# Altium PCB MotorDriver.PcbDoc
Units mm, origin at the board's own origin, x right, y up, seen from the top; angles counter-clockwise.
Board outline 97.16 x 62.48 mm, 2 copper layers (Top Layer, Bottom Layer); 84 components, 44 nets, 271 pads, 6 vias.
Unrouted connection lines stored in the file: 135.
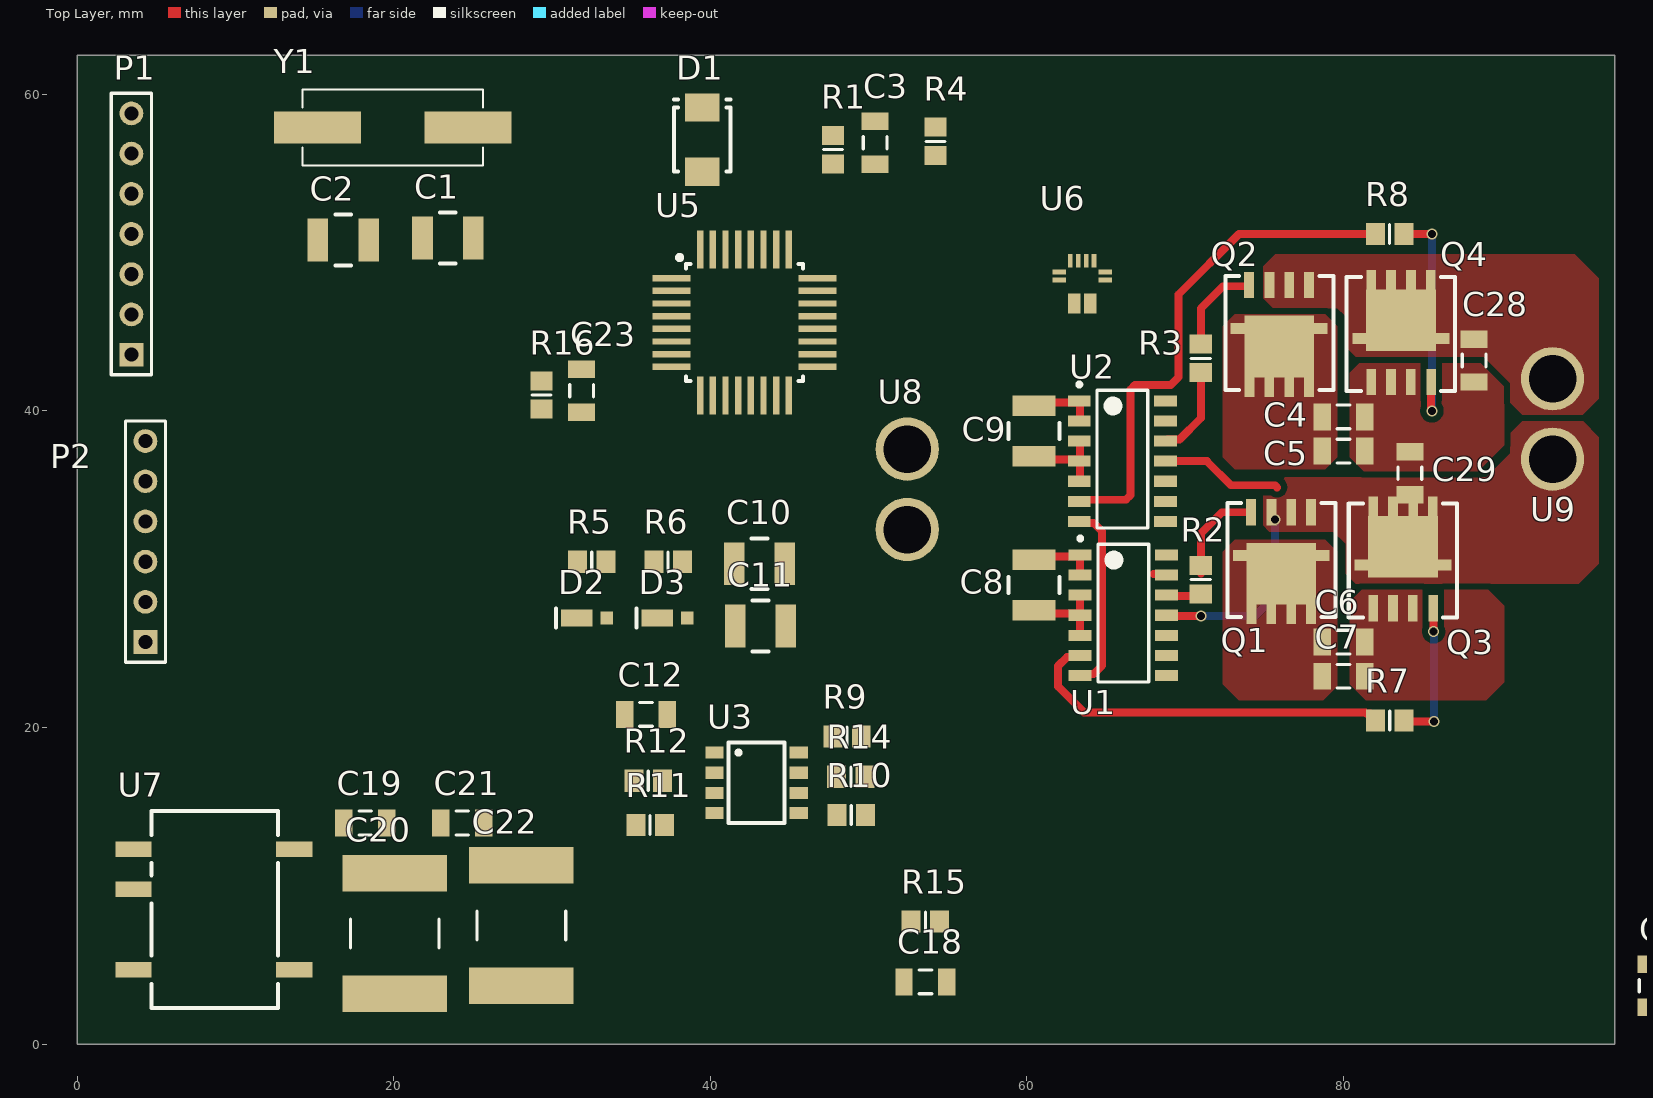
[diagram p0: Top Layer view]
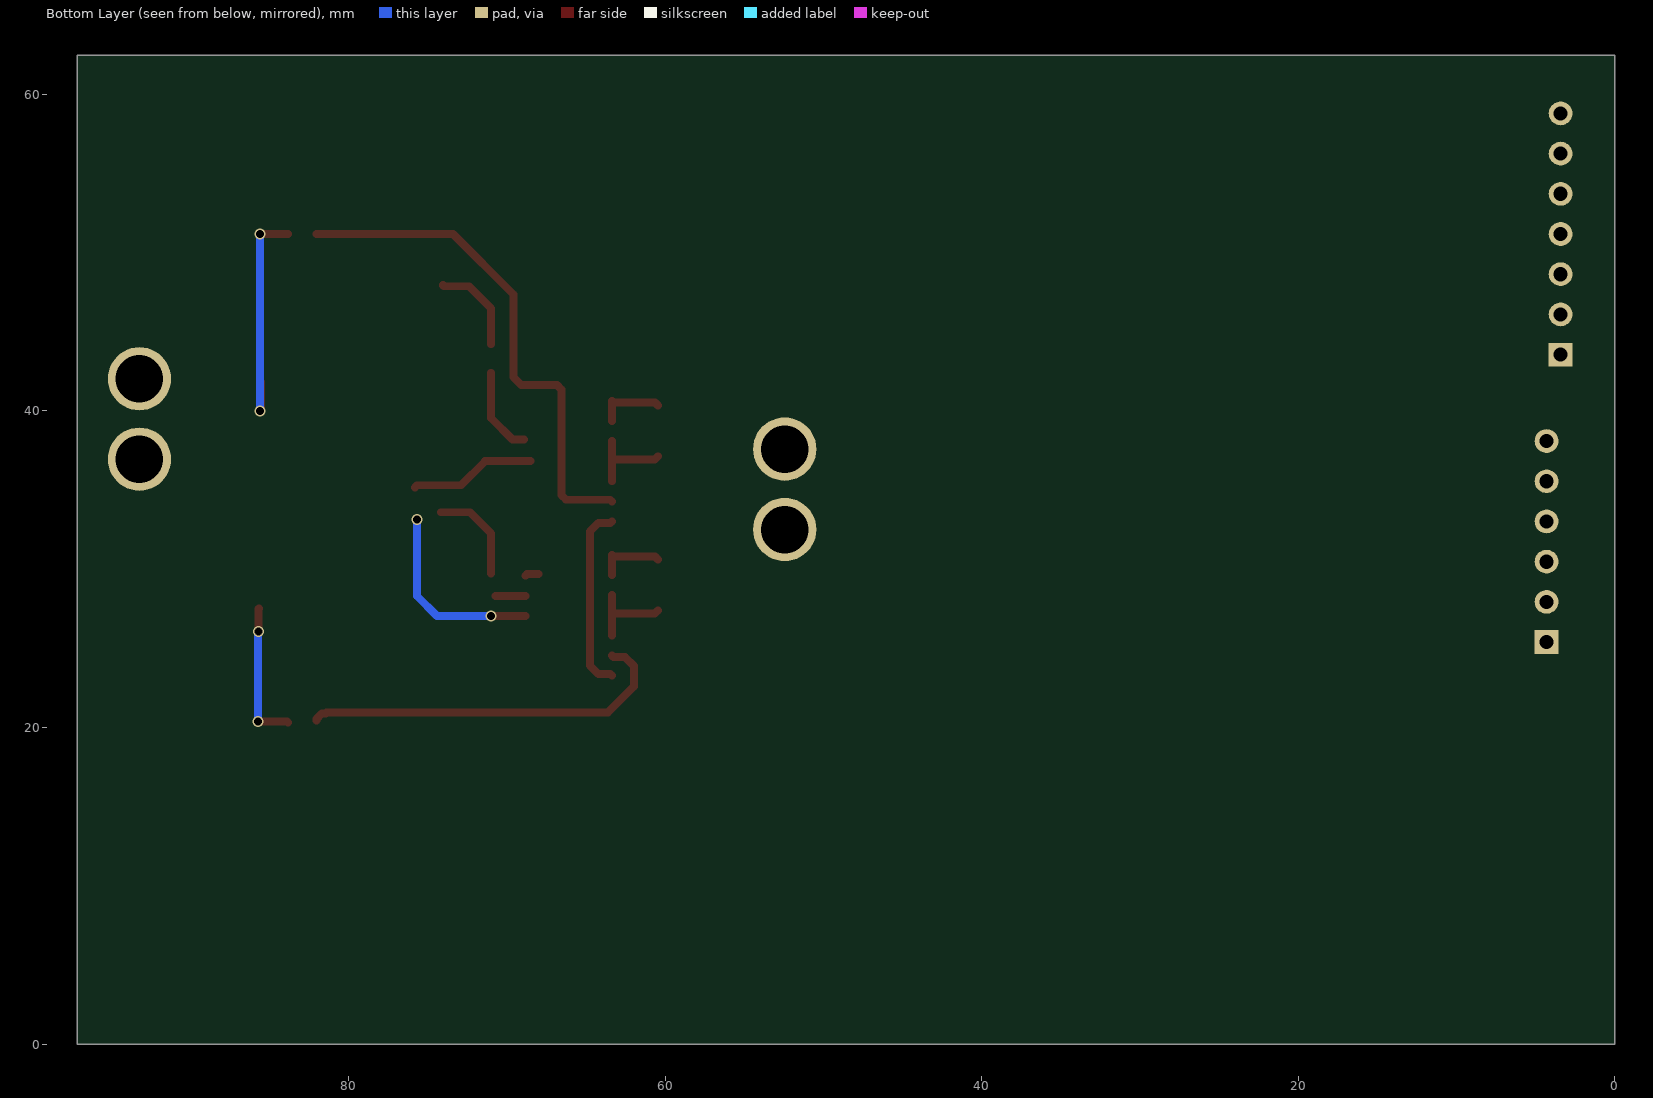
[diagram p1: Bottom Layer view, seen from below]

## Layer stack, top to bottom
Top Solder: solder mask 0.0102, Solder Resist, Dk 3.5
Top Layer: signal copper 0.0356
Dielectric 1: dielectric 0.32, FR-4, Dk 4.8
Bottom Layer: signal copper 0.0356
Bottom Solder: solder mask 0.0102, Solder Resist, Dk 3.5

## Board outline
0,0 97.155,0 97.155,62.484 0,62.484

## Design rules (kind name [scope] priority, off if disabled: settings)
Clearance [not InComponent('U6')] p1: gap=0.4 ignorepadtopadclearanceinfootprint=FALSE
PolygonConnect PowerDevices [All] p1: connectstyle=Direct reliefconductorwidth=0.254 reliefentries=4 polygonreliefangle="90 Angle" airgapwidth=0.254
PolygonConnect [All] p2: connectstyle=Relief reliefconductorwidth=0.254 reliefentries=4 polygonreliefangle="90 Angle" airgapwidth=0.254
RoutingVias [All] p1: holewidth=0.5 width=0.6 viastyle="Through Hole" minholewidth=0.5 minwidth=0.599 maxholewidth=0.711 maxwidth=1.27
SolderMaskExpansion [All] p1: expansion=0.102 istentingtop=FALSE
Width [All] p1: maxlimit=5 minlimit=0.499 preferedwidth=0.5
30 further rules are at their usual default settings.

## Components (designator, comment, footprint, x,y, rotation, side; value= is the part's Value field where it differs from the comment)
C1 "Cap CER" C1210 23.419,50.927 r0 top value=2200nF/100V
C2 "Cap CER" C1210 16.815,50.8 r180 top value=2200nF/100V
C3 "Cap CER" C1206 50.419,56.943 r270 top value=100nF/100V
C4 "Cap CER" C1206 80.01,39.624 r180 top value=100nF/100V
C5 "Cap CER" C1206 80.01,37.465 r180 top value=100nF/100V
C6 "Cap CER" C1206 80.01,25.4 r180 top value=100nF/100V
C7 "Cap CER" C1206 80.01,23.241 r180 top value=100nF/100V
C8 "Cap CER" C1210 60.452,29.007 r90 top value=2200nF/100V
C9 "Cap CER" C1210 60.452,38.74 r90 top value=2200nF/100V
C10 "Cap CER" C1210 43.104,30.353 r0 top value=2200nF/100V
C11 "Cap CER" C1210 43.18,26.416 r0 top value=2200nF/100V
C12 "Cap CER" C1206 35.941,20.828 r0 top value=100nF/100V
C13 "Cap CER" C1206 62.738,81.153 r0 top value=100nF/100V
C14 "Cap CER" C1206 63.754,85.725 r0 top value=100nF/100V
C15 "Cap Film" LDECE4150KA0N00 70.485,72.771 r90 top value=1.5uF/50V
C16 "Cap CER" C1206 63.627,89.408 r0 top value=100nF/100V
C17 "Cap Film" LDECE4150KA0N00 70.739,85.598 r90 top value=1.5uF/50V
C18 "Cap CER" C1206 53.594,3.937 r0 top value=100nF/100V
C19 "Cap CER" C1206 18.208,13.97 r0 top value=100nF/100V
C20 "Cap Film" LDECE4150KA0N00 20.066,6.985 r90 top value=1.5uF/50V
C21 "Cap CER" C1206 24.337,13.97 r0 top value=100nF/100V
C22 "Cap Film" LDECE4150KA0N00 28.067,7.493 r90 top value=1.5uF/50V
C23 "Cap CER" C1206 31.877,41.275 r270 top value=100nF/100V
C24 "CER 100nF" C1206 114.291,49.238 r0 top value=100nF/100V
C25 "CER 100nF" C1206 124.968,50.292 r90 top value=100nF/100V
C26 "CER 100nF" C1206 130.81,50.292 r90 top value=100nF/100V
C27 "CER 100nF" C1206 136.652,50.292 r90 top value=100nF/100V
C28 "CER 100nF" C1206 88.265,43.18 r90 top value=100nF/100V
C29 "CER 100nF" C1206 84.201,36.068 r270 top value=100nF/100V
C30 "CER 100nF" C1206 154.178,50.292 r90 top value=100nF/100V
C31 "CER 100nF" C1206 161.036,51.435 r0 top value=100nF/100V
C32 "CER 100nF" C1206 165.354,50.292 r90 top value=100nF/100V
C33 "CER 100nF" C1206 171.196,50.292 r90 top value=100nF/100V
C34 "Cap CER" C1206 142.494,4.318 r90 top value=100nF/100V
C35 "Cap CER" C1206 99.441,3.683 r90 top value=100nF/100V
D1 "DO-214AA SMB" DO-214AA 39.497,57.15 r270 top
D2 "MSS1P6-M3/89A" "MicroSMP (DO-219AD)" 32.512,26.924 r0 top
D3 "MSS1P6-M3/89A" "MicroSMP (DO-219AD)" 37.592,26.924 r0 top
P1 "Header 7" HDR1X7 3.429,43.561 r90 top
P2 "Header 6" HDR1X6 4.318,25.4 r90 top
Q1 "NMOS" BSC072N08NS5ATMA1_modified_v2 76.073,30.48 r180 top
Q2 "NMOS" BSC072N08NS5ATMA1_modified_v2 75.946,44.838 r180 top
Q3 "NMOS" BSC072N08NS5ATMA1_modified_v2 83.769,30.658 r0 top
Q4 "NMOS" BSC072N08NS5ATMA1_modified_v2 83.642,44.958 r0 top
R1 "Resistor 0805" R0805 47.752,56.515 r90 top value=?
R2 "Resistor 0805" R0805 70.993,29.348 r90 top value=?
R3 "Resistor 0805" R0805 70.993,43.318 r90 top value=?
R4 "Resistor 0805" R0805 54.229,57.034 r270 top value=?
R5 "Resistor 0805" R0805 32.512,30.48 r0 top value=?
R6 "Resistor 0805" R0805 37.338,30.48 r0 top value=?
R7 "Resistor 0805" R0805 82.931,20.447 r0 top value=?
R8 "Resistor 0805" R0805 82.92,51.181 r0 top value=?
R9 "Resistor 0805" R0805 48.641,19.431 r0 top value=?
R10 "Resistor 0805" R0805 48.906,14.478 r0 top value=?
R11 "Resistor 0805" R0805 36.195,13.843 r0 top value=?
R12 "Resistor 0805" R0805 36.079,16.637 r0 top value=?
R13 "Resistor 0805" R0805 62.368,74.676 r0 top value=?
R14 "Resistor 0805" R0805 48.884,16.891 r0 top value=?
R15 "Resistor 0805" R0805 53.594,7.747 r0 top value=?
R16 "Resistor 0805" R0805 29.337,41.01 r90 top value=?
TP_3V3 "TP_3V3" TP5015 208.407,4.699 r90 top
TP_12V "TP_12V" TP5015 179.959,4.699 r90 top
TP_DIR "TP_DIR" TP5015 248.158,4.699 r90 top
TP_GND "TP_GND" TP5015 128.905,29.972 r90 top
TP_PWML "TP_F/B" TP5015 215.265,4.699 r90 top
TP_PWMR "TP_PWM" TP5015 187.325,4.699 r90 top
TP_RX "TP_RX" TP5015 226.822,4.699 r90 top
TP_TX "TP_TX" TP5015 106.68,37.084 r90 top
TP_Vi "TP_Vi" TP5015 198.755,4.699 r90 top
TP_Vi_amp "TP_Vi_amp" TP5015 147.955,4.445 r90 top
TP_Vpwmn "TP_Vsi" TP5015 117.602,19.304 r90 top
TP_Vpwmp "TP_Vi_amp" TP5015 115.697,4.318 r90 top
TP_Vsi "TP_Vsi" TP5015 130.81,4.699 r90 top
TP_Vso "TP_Vso" TP5015 105.156,4.699 r90 top
U1 "IRS21834SPBF" SOIC127P600X175-14N 66.098,27.097 r0 top
U2 "IRS21834SPBF" SOIC127P600X175-14N 66.04,36.83 r0 top
U3 "LT6221IS8#PBF" SOIC8_NARROW 42.926,16.51 r0 top
U4 "LD1086D2M" D2PAK-3L 81.153,75.438 r180 top
U5 "ATMega328PB" TQFP32 42.164,45.593 r0 top
U6 "ACS70331EESATR-005U3" ACS70331_12QFN 63.5,48.133 r90 top
U7 "ISE0312A" ISE0312A 8.382,8.509 r0 top
U8 "2 PIN HEADER 3MM" 3mm_holes 52.451,35.052 r90 top
U9 "2 PIN HEADER 3MM" 3mm_holes 93.218,39.497 r270 top
Y1 "ECS-80-18-5PX-TR" XTAL_ECS-80-18-5PX-TR 19.939,57.912 r180 top

## Footprints (in the part's own frame and the unit in brackets; to place one, negate y for a bottom-side part, rotate by r counter-clockwise, add the part's x,y. Pads: shape width x height; smd on the part's side, far side on the other; paste and mask are expansions set on the pad)
3mm_holes [mm]
  round 4 hole 3: 1(-2.54,0) 2(2.54,0)
ACS70331_12QFN [mm] "HIGH SENSITIVITY, 1 MHZ, GMR-BAS"
  rect 1.27x0.8 smd: 1(-1.35,0.5) 2(-1.35,-0.5)
  rect 0.3x0.85 smd: 5(0.15,-1.45) 6(0.65,-1.45) 11(0.65,1.45) 12(0.15,1.45)
  rect 0.85x0.3 smd: 7(1.35,-0.75) 8(1.35,-0.25) 9(1.35,0.25) 10(1.35,0.75)
  body extent -1.6,-1.5 1.4,1.5, height 0.75
BSC072N08NS5ATMA1_modified_v2 [mil]
  rect 23.94x65 smd: 1(-74,-123) 1(-25,-123) 1(24,-123) 4(75,-123) 8(-74,123) 8(-25,123) 8(25,123) 8(74,123)
  rect 65x27.87 smd: 8(-88,-15) 8(88,-15)
  rect 173.62x153.54 smd: 8(0,30.26)
  silkscreen extent -135,-146 134,138, body extent -106,-127 107,127, height 40
C1206 [mm] "Chip Capacitor, Body 3.2x1.6mm, IPC High Density"
  rect 1.1x1.7 smd: 1(-1.35,0) 2(1.35,0)
  silkscreen extent -0.4,-0.75 0.4,0.75, body extent -1.6,-0.8 1.6,0.8, height 1.5
C1210 [mm]
  rect 1.3x2.7 smd: 1(-1.6,0) 2(1.6,0)
  silkscreen extent -0.5,-1.6 0.5,1.6, body extent -1.8,-1.4 1.8,1.4, height 1.24
D2PAK-3L [mil]
  rect 63x137.8 smd: 1(100,-350) 2(0,-350) 3(-100,-350)
  silkscreen extent -205,-165 205,295, body extent -190,-400 190,279, height 200
DO-214AA [mil]
  rect 70x85 smd: 1(-80,0) 2(80,0)
  silkscreen extent -100,-70 80,70, body extent -104,-71 104,71, height 87
HDR1X6 [mm] "Connector; Header; 6 Position"
  rect 1.5x1.5 hole 0.9: 1(0,0)
  round 1.5 hole 0.9: 2(2.54,0) 3(5.08,0) 4(7.62,0) 5(10.16,0) 6(12.7,0)
  silkscreen extent -1.27,-1.27 13.97,1.27
HDR1X7 [mm] "Connector; Header; 7 Position"
  rect 1.5x1.5 hole 0.9: 1(0,0)
  round 1.5 hole 0.9: 2(2.54,0) 3(5.08,0) 4(7.62,0) 5(10.16,0) 6(12.7,0) 7(15.24,0)
  silkscreen extent -1.27,-1.27 16.51,1.27
ISE0312A [mil] "8-SMD model; 5 leads"
  rect 90x39 smd: 1(-190,150) 2(-190,50) 4(-190,-150) 5(210,-150) 8(210,150)
  silkscreen extent -145,-245 170,245, body extent -210,-250 230,250, height 285
LDECE4150KA0N00 [mm]
  rect 2.3x6.6 smd: 1(-3.8,0) 2(3.8,0)
  silkscreen extent -0.9,-2.8 0.9,2.8, body extent -3.82,-3.26 3.88,3.24, height 4.29
"MicroSMP (DO-219AD)" [mm]
  rect 0.8x0.8 smd: 1(0.95,0)
  rect 2x1.1 smd: 2(-0.95,0)
  silkscreen extent -2.25,-0.6 -2.25,0.6, body extent -1.58,-0.64 0.92,0.66, height 0.66
R0805 [mm]
  rect 1.2x1.4 smd: 1(-0.9,0) 2(0.9,0)
  silkscreen extent 0,-0.6 0,0.6, body extent -1.04,-0.63 0.99,0.64, height 0.6
SOIC8_NARROW [mil]
  rect 45x30 smd: 1(-105,75) 2(-105,25) 3(-105,-25) 4(-105,-75) 5(105,-75) 6(105,-25) 7(105,25) 8(105,75)
  silkscreen extent -70,-100 70,100, body extent -122,-98 122,99, height 69
SOIC127P600X175-14N [mm] "SOIC, 14-Leads, Body 8.65x3.90mm, Pitch 1.27mm, IPC Medium Density"
  rect 1.45x0.7 smd: 1(-2.725,3.81) 2(-2.725,2.54) 3(-2.725,1.27) 4(-2.725,0) 5(-2.725,-1.27) 6(-2.725,-2.54) 7(-2.725,-3.81) 8(2.725,-3.81) 9(2.725,-2.54) 10(2.725,-1.27) 11(2.725,0) 12(2.725,1.27) 13(2.725,2.54) 14(2.725,3.81)
  silkscreen extent -2.85,-4.22 1.6,4.97, body extent -3,-4.19 3,4.46, height 1.56
TP5015 [mil]
  rect 105x40 smd: 1(0,0)
  body extent -51,-20 51,19, height 59
TQFP32 [mm]
  rect 2.4x0.4 smd: 1(-4.6,2.8) 2(-4.6,2) 3(-4.6,1.2) 4(-4.6,0.4) 5(-4.6,-0.4) 6(-4.6,-1.2) 7(-4.6,-2) 8(-4.6,-2.8) 17(4.6,-2.8) 18(4.6,-2) 19(4.6,-1.2) 20(4.6,-0.4) 21(4.6,0.4) 22(4.6,1.2) 23(4.6,2) 24(4.6,2.8)
  rect 0.4x2.4 smd: 9(-2.8,-4.6) 10(-2,-4.6) 11(-1.2,-4.6) 12(-0.4,-4.6) 13(0.4,-4.6) 14(1.2,-4.6) 15(2,-4.6) 16(2.8,-4.6) 25(2.8,4.6) 26(2,4.6) 27(1.2,4.6) 28(0.4,4.6) 29(-0.4,4.6) 30(-1.2,4.6) 31(-2,4.6) 32(-2.8,4.6)
  silkscreen extent -4.24,-3.7 3.7,4.24, body extent -3.5,-3.5 3.5,3.5, height 1.3
XTAL_ECS-80-18-5PX-TR [mm]
  rect 5.5x2 smd: 1(-4.75,0) 2(4.75,0)
  silkscreen extent -5.7,-2.4 5.7,2.4, body extent -6.6,-2.41 6.6,2.41, height 4.32

## Part data
C1 C2 C8 C9 C10 C11: library part "Cap CER HF DC-Link CL32B225KCJSNNE", "CAP CER 2.2UF 100V X7R 1210", Manufacturer="AVX Corporation", MPN=CL32B225KCJSNNE, Supplier Part Number 1=1276-3362-1-ND, Part Description="CAP CER 2.2UF 100V X7R 1210", Supplier 1=Digi-Key, Supplier 2=Arrow, Supplier Part Number 2=CL32B225KCJSNNE, Type="Surface mount"
C3 C4 C5 C6 C7 C12 C13 C14 C16 C18 C19 C21 C23 C24 C25 C26 C27 C28 C29 C30 C31 C32 C33 C34 C35: library part "Cap CER Decoup C3216C0G2A104J160AC", "CAP CER 0.1UF 100V C0G 1206", Manufacturer="TDK Corporation", MPN=C3216C0G2A104J160AC, Supplier Part Number 1=1795799, Part Description="CAP CER 0.1UF 100V C0G 1206", Supplier 1=RSComponents, Supplier 2=Element14, Supplier 3=Digi-Key, Supplier 4=Mouser, Supplier Part Number 2=2906828, Supplier Part Number 3=445-172677-1-ND, Supplier Part Number 4=810-C3216C0G2A104J6C, Type="Surface mount"
C15 C17 C20 C22: library part "Cap Film SMD LDECE4150KA0N00", "CAP FILM 1.5UF 10% 50VDC 2824", Manufacturer=KEMET, MPN=LDECE4150KA0N00, Supplier Part Number 1=2495712, Part Description="CAP FILM 1.5UF 10% 50VDC 2824", Supplier 1=Element14, Supplier 2=RSComponents, Supplier 3=Digi-Key, Supplier 4=Mouser, Supplier Part Number 2=1650342, Supplier Part Number 3=399-12858-1-ND, Supplier Part Number 4=80-LDECE4150KA0N00, Type="Surface mount"
D1: library part SMBJ5351B-TP, "14V zener diode"
D2 D3: library part "Diode MSS1P6-M3/89A", "DIODE SCHOTTKY 60V 1A MICROSMP", Manufacturer="Vishay Semiconductor Diodes Division", Supplier Part Number 1=7103070P, MPN=MSS1P6-M3/89A, Part Description="DIODE SCHOTTKY 60V 1A MICROSMP", Supplier 1=RSComponents, Supplier 2=Element14, Supplier Part Number 2=2335157, Type="Surface mount"
P1: "Header, 7-Pin", LatestRevisionDate=17-Jul-2002, LatestRevisionNote="Re-released for DXP Platform.", Publisher="Altium Limited"
P2: "Header, 6-Pin", LatestRevisionDate=17-Jul-2002, LatestRevisionNote="Re-released for DXP Platform.", Publisher="Altium Limited"
Q1 Q2 Q3 Q4: library part "NMOS OptiMOS BSC072N08NS5ATMA1", "MOSFET N-CH 80V 74A 8TDSON", Manufacturer="Infineon Technologies", MPN=BSC072N08NS5ATMA1, Supplier Part Number 1=2725812, Part Description="MOSFET N-CH 80V 74A 8TDSON", Supplier 1=Element14, Supplier 2=Digi-Key, Supplier 3=Mouser, Supplier Part Number 2=BSC072N08NS5ATMA1CT-ND, Supplier Part Number 3=726-BSC072N08NS5ATMA, Type="Surface mount"
R1 R2 R3 R4 R5 R6 R7 R8 R9 R10 R11 R12 R13 R14 R15 R16: library part RES0805, "RES0805", MPN=?, Part Description=?, Type="Surface Mount"
TP_3V3 TP_12V TP_DIR TP_GND TP_PWML TP_PWMR TP_RX TP_TX TP_Vi TP_Vi_amp TP_Vpwmn TP_Vpwmp TP_Vsi TP_Vso: library part TP_5015, "SM Test Point 5015"
U1 U2: "IC GATE DRVR HALF-BRIDGE 14SOIC"
U4: library part LD1086D2M33TR, "3.3V linear voltage regulator"
U5: "IC MCU 8BIT 32KB FLASH 32TQFP", Supplier Part Number 1=ATMEGA328PB-AU-ND, Supplier 1=Digi-Key, Supplier 2=Digikey, Supplier Part Number 2=ATMEGA328PB-AU-ND
U6: library part ACS70331_QFN, "HIGH SENSITIVITY, 1 MHZ, GMR-BAS"
U7: library part ISE0312A_8-SMD_5L, "3V-12V DC DC converter"
U8 U9: library part HEADER_2PIN, "3MM HOLES"
Y1: "8MHz Â±30ppm Crystal 18pF 60 Ohms HC-49/US", Package="HC49/US ECS International", Digi-Key_Part_Number=XC1271CT-ND, Digi-Key_Purchase_URL=https://www.digikey.com/product-detail/en/ecs-inc/ECS-80-18-5PX-TR/XC1271CT-ND/827735?utm_source=snapeda&utm_medium=aggregator&utm_campaign=symbol, MF="ECS Inc.", MP=ECS-80-18-5PX-TR, SnapEDA_Link=https://www.snapeda.com/parts/ECS-80-18-5PX-TR/ECS%20Inc./view-part/470513/?ref=snap

## Via types
v1: diameter 0.7, hole 0.5, Top Layer to Bottom Layer, 6 vias

## Nets (pads, with @x,y where several pads share a name; then routed paths per layer and width w, separated by ;. In a path a pad name is that pad's centre, name@x,y a point inside that pad or via, vN(x,y) a via of type N, cw(c..) or ccw(c..) an arc to the next point about the centre after c; other vN are vias at no path point)
3V3: C16.2 C17.2 C19.2 C20.2 C24.2 C25.2 C30.2 C33.2 C35.1 P2.2 R16.2 TP_3V3.1 U3.8 U4.2 U5.4 U5.20 U6.12 U7.2
12V: C21.2 C22.2 C26.2 C27.2 D2.1 D3.1 TP_12V.1 U1.7 U2.7 U7.5 | length 11.8
  Top Layer w0.5: U1.7 63.473,23.387 64.223,23.387 64.748,23.912 64.748,32.395 64.223,32.92 63.473,32.92 U2.7@63.373,33.02
CTS_0: P1.2 U5.13
D1H: R2.1 U1.12 | length 1.9
  Top Layer w0.5: U1.12@68.823,28.321 R2.1@70.728,28.321
D1L: R7.1 U1.6 | length 24
  Top Layer w0.5: U1.6 63.273,24.457 62.549,24.457 61.976,23.884 61.976,22.606 63.627,20.955 81.388,20.955 81.446,20.897 81.681,20.897 82.031,20.547 R7.1
D2H: R3.1 U2.12 | length 5.5
  Top Layer w0.5: U2.12@68.923,38.2 69.647,38.2 70.993,39.546 R3.1
D2L: R8.1 U2.6 | length 32.6
  Top Layer w0.5: U2.6@63.373,34.29 63.473,34.39 66.255,34.39 66.548,34.683 66.548,41.347 66.841,41.64 69.096,41.64 69.596,42.14 69.596,47.371 73.406,51.181 R8.1
DIR_SIG: P1.4 TP_DIR.1 U5.28
GND: C1.1 C2.1 C3.1 C4.1 C5.1 C6.1 C7.1 C8.1 C9.1 C12.1 C13.1 C14.1 C15.1 C16.1 C17.1 C18.1 C19.1 C20.1 C21.1 C22.1 C23.1 C24.1 C25.1 C26.1 C27.1 C28.1 C29.1 C30.1 C31.1 C32.1 C33.1 C34.1 C35.2 D1.2 P2.3 Q3.1 Q4.1 R4.1 R12.1 R14.1 TP_GND.1 U1.3 U1.4 U1.5 U2.3 U2.4 U2.5 U3.4 U3.6 U3.7 U4.3 U5.5 U5.21 U6.5 U6.6 U6.8 U6.9 U6.11 U7.1 U7.4 U8.2 | length 11.2
  Top Layer w0.5: C8.1 60.662,27.197 63.273,27.197 U1.4 ; C9.1 60.662,36.93 63.273,36.93 U2.4@63.373,36.83 ; U1.5 U1.4 ; U1.3 U1.4 ; U2.5@63.373,35.56 U2.4@63.373,36.83 ; U2.3@63.373,38.1 U2.4@63.373,36.83
HIN1: C8.2 R5.1 U1.1 U1.2 | length 4.3
  Top Layer w0.5: C8.2 60.652,30.807 63.273,30.807 U1.1 U1.2
HIN2: C9.2 R6.1 U2.1 U2.2 | length 4.3
  Top Layer w0.5: C9.2 60.652,40.54 63.273,40.54 63.373,40.64 U2.2@63.373,39.37
NetC23_2: C23.2 R16.1 U5.18
NetQ1_4: Q1.4 R2.2 | length 8
  Top Layer w0.5: R2.2@70.993,29.729 70.993,32.131 ; R2.2@70.993,30.375 70.993,32.258 72.339,33.604 Q1.4
NetQ2_4: Q2.4 R3.2 | length 5.9
  Top Layer w0.5: R3.2 70.993,46.482 72.39,47.879 73.987,47.879 74.041,47.933 Q2.4
NetQ3_4: Q3.4 R7.2 | length 9.1
  Top Layer w0.5: R7.2@83.831,20.32 83.883,20.372 v1(85.722,20.372) ; Q3.4 85.7,27.508 v1(85.7,26.06)
  Bottom Layer w0.5: v1(85.7,26.06) 85.725,26.035 v1@85.725,20.372
NetQ4_4: Q4.4 R8.2 | length 14.9
  Top Layer w0.5: R8.2 v1(85.598,51.181) ; v1@85.547,39.929 Q4.4 Q4.4@85.601,41.78
  Bottom Layer w0.5: v1(85.598,40.005) v1(85.598,51.181)
NetR9_1: R9.1 R10.2 U3.2
NetR9_2: R9.2 R11.2
NetR12_2: R12.2 R14.2 U3.3
NetR15_1: R15.1 U6.10
NetU3_1: U3.1 U3.5
PWM_L: R5.2 TP_PWML.1 U5.9
PWM_R: R6.2 TP_PWMR.1 U5.1
RESET: U5.11
RST: C34.2 U5.29
RTS_0: P1.1 U5.12
RX_0: P1.3 TP_RX.1 U5.30
S1H: C10.1 C29.2 Q1.1 Q3.8 TP_Vpwmn.1 U1.11 U9.2 | length 12.2
  Top Layer w0.5: U1.11@68.823,27.051 v1(70.993,27.051)
  Bottom Layer w0.5: v1(70.993,27.051) 74.422,27.051 75.692,28.321 v1(75.692,33.147)
S2H: C11.1 C28.2 Q2.1 Q4.8 TP_Vpwmp.1 U2.11 U9.1 | length 7.9
  Top Layer w0.5: U2.11@68.511,36.83 U2.11 ; U2.11@68.823,36.83 71.374,36.83 72.898,35.306 75.692,35.306 75.819,35.179
Spd_Sig0: P1.6 U5.26
Spd_Sig1: P1.5 U5.27
ST_INT: U5.32
TX_0: TP_TX.1 U5.31
VB1: C10.2 D2.2 U1.13 | length 0.9
  Top Layer w0.5: 67.999,29.691 68.723,29.691 U1.13@68.823,29.591
VB2: C11.2 D3.2 U2.13
Vi: C18.2 C31.2 R10.1 R15.2 TP_Vi.1
Vi_amp: C12.2 R11.1 TP_Vi_amp.1 U5.23
Vin: C32.2 D1.1 R1.2 R13.1 TP_Vsi.1 U6.1 U8.1
VinFILT: C13.2 C14.2 C15.2 R13.2 U4.1
Vs: C3.2 R1.1 R4.2 U5.24
Vso: C4.2 C5.2 C6.2 C7.2 Q1.8 Q2.8 TP_Vso.1 U6.2
Wout: P2.1 U5.14
X1: C1.2 U5.7 Y1.1
X2: C2.2 U5.8 Y1.2
pads on no net: P1.7 P2.4 P2.5 P2.6 U1.8 U1.9 U1.10 U1.14 U2.8 U2.9 U2.10 U2.14 U5.2 U5.3 U5.6 U5.10 U5.15 U5.16 U5.17 U5.19 U5.22 U5.25 U6.7 U7.8

## Polygon pours and split planes (outlines as drawn)
S1H on Top Layer "S1H_L01_P017" (solid, remove dead copper, pour order 17): 91.313,39.37 90.551,38.608 90.551,37.338 89.027,35.814 75.438,35.814 74.93,35.306 74.93,32.766 75.311,32.385 79.375,32.385 80.137,31.623 80.137,29.718 80.772,29.083 94.869,29.083 96.139,30.353 96.139,38.354 95.123,39.37
GND on Top Layer "GND_L01_P015" (solid, remove dead copper, pour order 15): 80.391,27.94 81.153,28.702 89.162,28.702 89.162,28.694 90.17,27.686 90.17,22.86 89.027,21.717 81.407,21.717 80.391,22.733
GND on Top Layer "GND_L01_P014" (solid, remove dead copper, pour order 14): 80.391,42.418 81.026,43.053 88.646,43.053 90.17,41.529 90.17,37.846 88.519,36.195 81.28,36.195 80.391,37.084 80.391,42.418 81.026,43.053
S2H on Top Layer "S2H_L01_P013" (solid, remove dead copper, pour order 13): 75.565,46.482 74.93,47.117 74.93,49.149 75.692,49.911 94.615,49.911 96.139,48.387 96.139,40.767 95.123,39.751 91.313,39.751 90.551,40.513 90.551,41.751 88.868,43.434 80.772,43.434 80.137,44.069 80.137,45.974 79.629,46.482
Vso on Top Layer "VSO_L01_P005" (solid, remove dead copper, pour order 5): 73.152,31.877 78.867,31.877 79.629,31.115 79.629,22.606 78.74,21.717 73.406,21.717 72.39,22.733 72.39,31.115
Vso on Top Layer "VSO_L01_P001" (solid, remove dead copper, pour order 1): 73.152,46.101 78.867,46.101 79.629,45.339 79.629,37.084 78.867,36.322 73.152,36.322 72.39,37.084 72.39,45.339